# Altium PCB RF_SENSOR_AMP.PcbDoc
Units mm, origin at the board's own origin, x right, y up, seen from the top; angles counter-clockwise.
Board outline 43 x 19.3 mm, 2 copper layers (Top Layer, Bottom Layer); 24 components, 11 nets, 48 pads, 0 vias.
Unrouted connection lines stored in the file: 1.
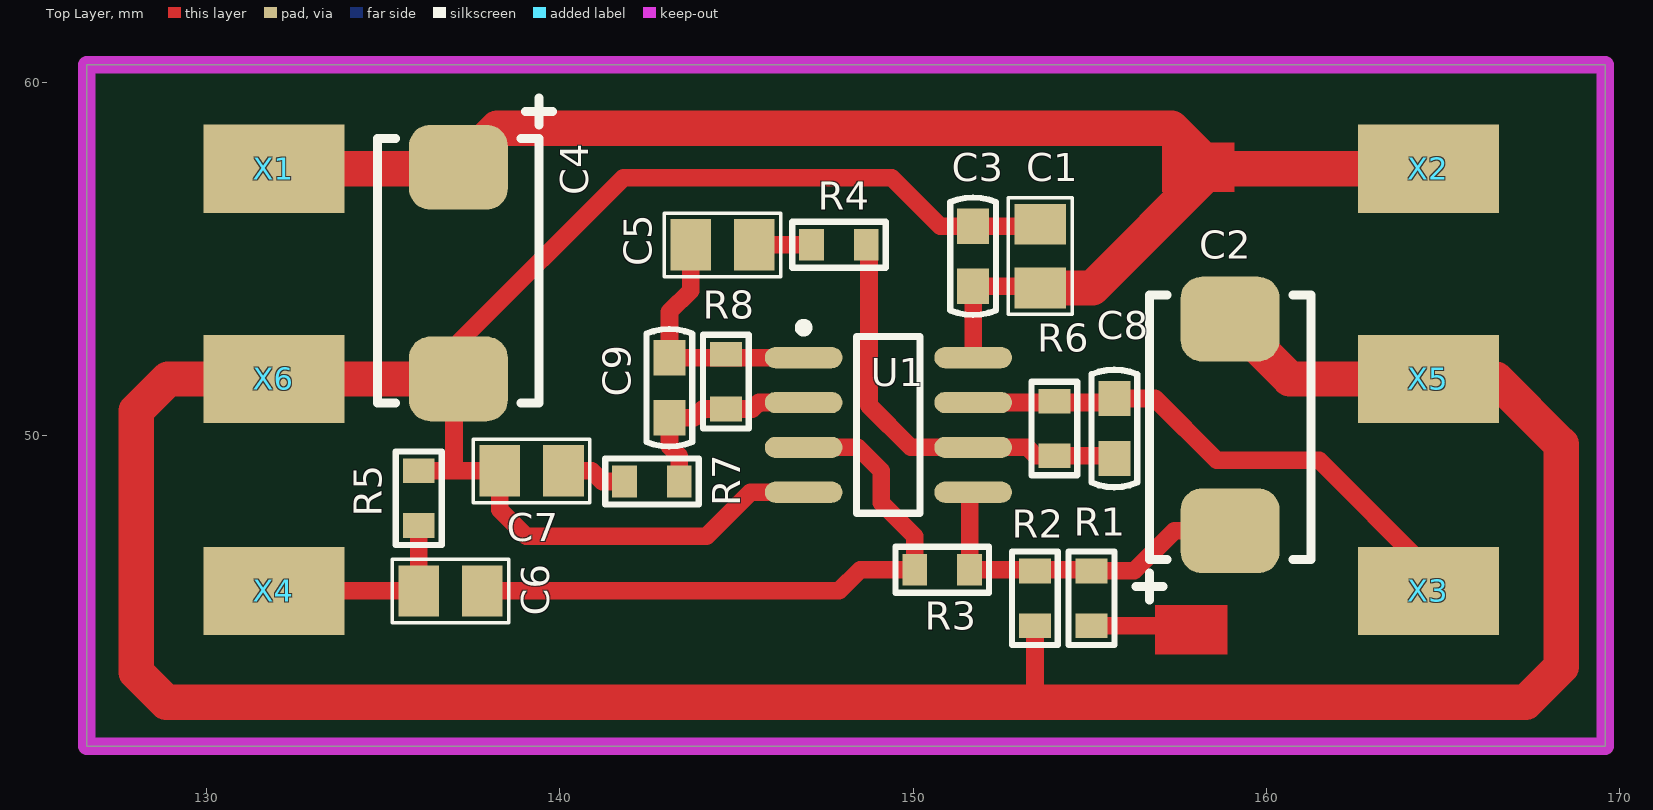
[diagram p0: Top Layer view]
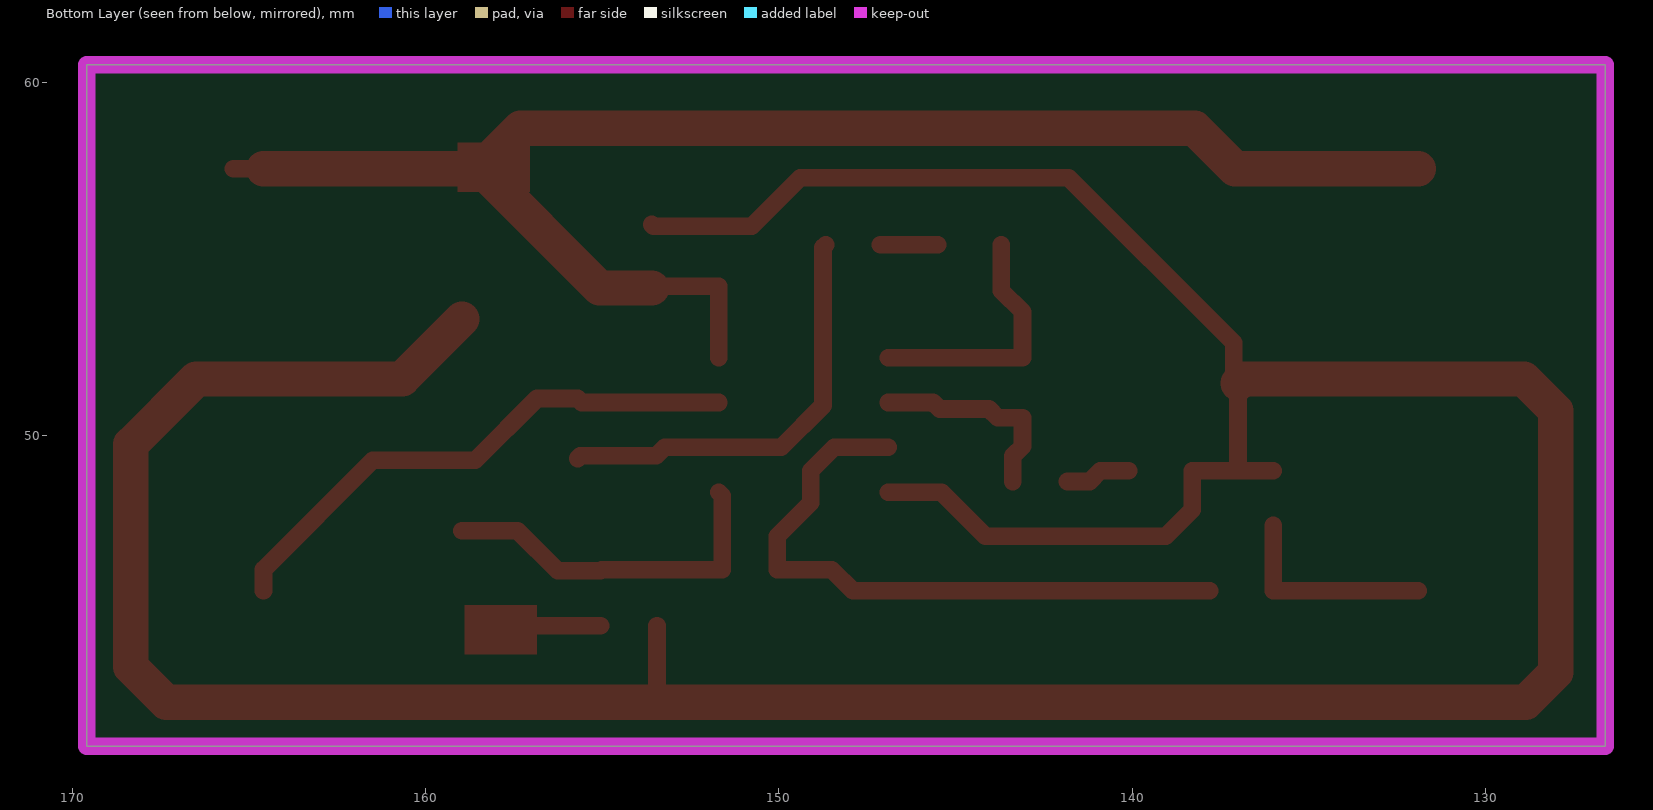
[diagram p1: Bottom Layer view, seen from below]
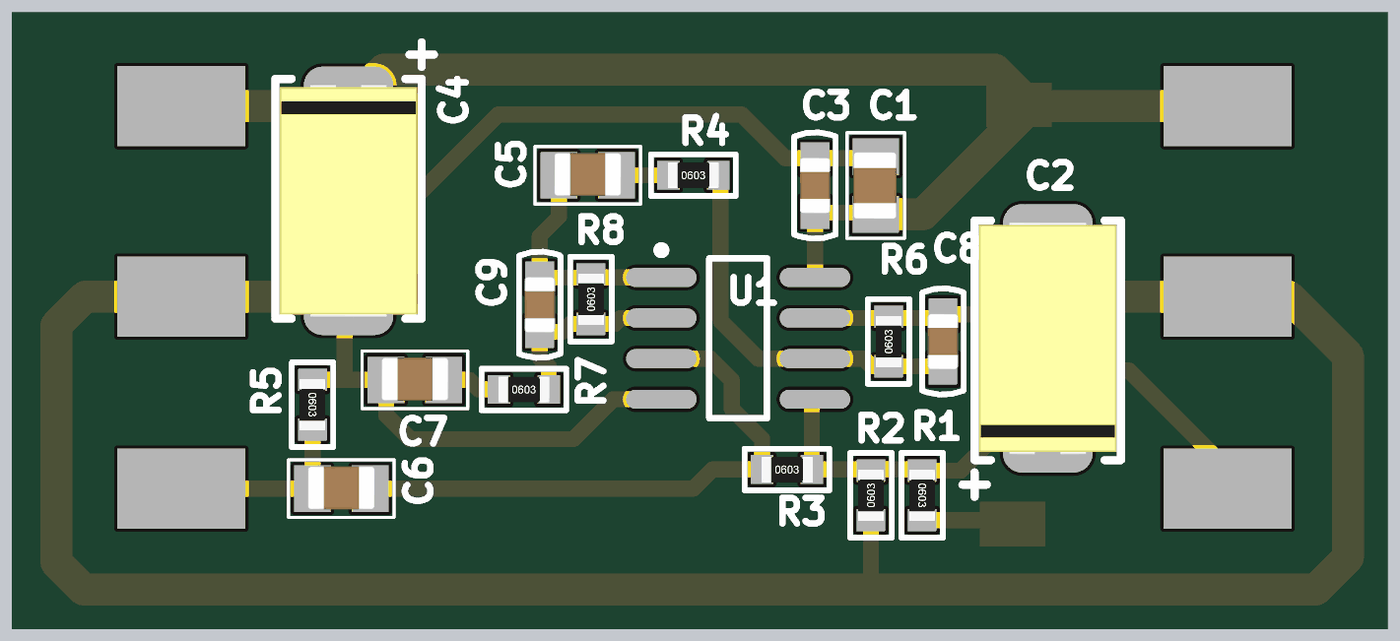
[diagram p2: 3D render of the assembled board from above, using the file's embedded part models]

## Layer stack, top to bottom
Top Solder: solder mask 0.0102, Solder Resist, Dk 3.5
Top Layer: signal copper 0.0356
Dielectric 1: dielectric 0.32, FR-4, Dk 4.8
Bottom Layer: signal copper 0.0356
Bottom Solder: solder mask 0.0102, Solder Resist, Dk 3.5

## Board outline
126.6,41.2 126.6,60.5 169.6,60.5 169.6,41.2

## Design rules (kind name [scope] priority, off if disabled: settings)
Clearance [All] p1: gap=0.5 ignorepadtopadclearanceinfootprint=FALSE
PolygonConnect [All] p1: connectstyle=Relief reliefconductorwidth=0.254 reliefentries=4 polygonreliefangle="90 Angle" airgapwidth=0.254
RoutingVias [All] p1: holewidth=0.711 width=1.27 viastyle="Through Hole" minholewidth=0.711 minwidth=1.27 maxholewidth=0.711 maxwidth=1.27
SolderMaskExpansion [All] p1: expansion=0.102
Width [All] p1: maxlimit=1 minlimit=0.3 preferedwidth=0.5
30 further rules are at their usual default settings.

## Components (designator, comment, footprint, x,y, rotation, side; value= is the part's Value field where it differs from the comment)
C1 "10uF" CC0805 153.6,55.078 r90 top
C2 "TAJ-D" TAJ-D-1M 159,50.3 r270 top value=470uFx6.3V
C3 "0.1uF" CC0603 151.7,55.078 r90 top
C4 "TAJ-D" TAJ-D-1M 137.1,54.6 r90 top value=470uFx6.3V
C5 "4.7uF" CC0805 144.6,55.4 r0 top
C6 "4.7uF" CC0805 136.9,45.6 r0 top
C7 "4.7uF" CC0805 139.2,49 r0 top
C8 "2.2nF" CC0603 155.7,50.2 r90 top
C9 "2.2nF" CC0603 143.1,51.35 r90 top
R1 "100k" RC0603 155.05,45.391 r270 top
R2 "100k" RC0603 153.45,45.391 r90 top
R3 "330k" RC0603 150.825,46.2 r0 top
R4 "10k" RC0603 147.9,55.4 r0 top
R5 "10k" RC0603 136,48.225 r270 top
R6 "1M" RC0603 154,50.2 r90 top
R7 "10k" RC0603 142.605,48.7 r0 top
R8 "1M" RC0603 144.7,51.525 r90 top
U1 "LM2904M" M08A_N 149.3,50.3 r0 top
X1 "PIN_2.5x4mm_SMD" PIN_2.5x4mm_SMD 131.9,57.558 r0 top
X2 "PIN_2.5x4mm_SMD" PIN_2.5x4mm_SMD 164.592,57.558 r0 top
X3 "PIN_2.5x4mm_SMD" PIN_2.5x4mm_SMD 164.592,45.6 r0 top
X4 "PIN_2.5x4mm_SMD" PIN_2.5x4mm_SMD 131.9,45.6 r0 top
X5 "PIN_2.5x4mm_SMD" PIN_2.5x4mm_SMD 164.592,51.603 r0 top
X6 "PIN_2.5x4mm_SMD" PIN_2.5x4mm_SMD 131.9,51.603 r0 top

## Footprints (in the part's own frame and the unit in brackets; to place one, negate y for a bottom-side part, rotate by r counter-clockwise, add the part's x,y. Pads: shape width x height; smd on the part's side, far side on the other; paste and mask are expansions set on the pad)
CC0603 [mm]
  rect 1x0.9 smd paste-25.4: 1(-0.85,0) 2(0.85,0)
  silkscreen extent -1.66,-0.65 1.66,0.65, body extent -0.87,-0.47 0.88,0.48, height 0.85
CC0805 [mm]
  rect 1.15x1.45 smd paste-25.4: 1(-0.9,0) 2(0.9,0)
  silkscreen extent -1.65,-0.9 1.65,0.9, body extent -1.05,-0.65 1.05,0.7, height 1.1
M08A_N [mm] "SOIC, 8-Leads, Body 4.9x3.9mm, Pitch 1.27mm, IPC Medium Density"
  oval 2.2x0.6 smd: 1(-2.4,1.905) 2(-2.4,0.635) 3(-2.4,-0.635) 4(-2.4,-1.905) 5(2.4,-1.905) 6(2.4,-0.635) 7(2.4,0.635) 8(2.4,1.905)
  silkscreen extent -2.52,-2.5 0.9,2.88, body extent -2,-2.5 2,2.5, height 1.75
PIN_2.5x4mm_SMD [mm]
  rect 4x2.5 smd: 1(0,0)
RC0603 [mm]
  rect 0.7x0.9 smd paste-25.4: 1(-0.775,0) 2(0.774,0)
  silkscreen extent -1.32,-0.65 1.33,0.65, body extent -0.8,-0.4 0.8,0.4, height 0.45
TAJ-D-1M [mm]
  rrect50% 2.4x2.8 smd: 1(2.997,-0.025) 2(-2.997,-0.025)
  silkscreen extent -3.68,-2.69 4.95,2.26, body extent -3.65,-2.18 3.65,2.12, height 2.81

## Part data
C1 C5 C6 C7: library part CC0805, "CC0805"
C3 C8 C9: library part CC0603, "CC0603"
R1 R2 R3 R4 R5 R6 R7 R8: library part RC0603, "RC0603"
U1: "Low Power Dual Operational Amplifier, 8-pin Narrow SOIC", Manufacturer="National Semiconductor", PackageTopMarking=NSZXTT*LM*2904M, PowerWise=N, Supplier Part Number 1=9486860, Code_IPC=SOIC127P600-8, Code_JEDEC=MS-012-AA, ComponentLink1Description="LM2904 Datasheet", ComponentLink1URL=http://www.national.com/ds/LM/LM2904.pdf, ComponentLink2Description="LM2904 Web Page", ComponentLink2URL=http://www.national.com/pf/LM/LM2904.html, ComponentLink3Description="M08A Package Page", ComponentLink3URL=http://www.national.com/packaging/folders/m08a.html, CompType=Amplifiers, DatasheetVersion=Oct-2005, LatestRevisionDate=13-Jan-2009, LatestRevisionNote="Sim Model Added.", PackageDescription="SOIC Narrow, 4.9 x 3.9 x 1.45mm, 8 Lead, 1.27mm Pitch", PackageReference=M08A, PackageVersion="revM, May-2009", PartNumber=LM2904M, PinCount=8, Published=4-Dec-2008, Publisher="Altium Limited", RoHS=N, Supplier 1=Farnell

## Nets (pads, with @x,y where several pads share a name; then routed paths per layer and width w, separated by ;. In a path a pad name is that pad's centre, name@x,y a point inside that pad or via, vN(x,y) a via of type N, cw(c..) or ccw(c..) an arc to the next point about the centre after c; other vN are vias at no path point)
+5V: C1.1 C3.1 C4.1 R1.2 U1.8 X1.1 X2.1 | length 47.1
  Top Layer w0.5: U1.8 C3.1 153.55,54.228 C1.1 ; R1.2 157.483,44.617 ; X2.1 X2.1@165.442,57.558
  Top Layer w1: X1.1 137.086,57.558 C4.1 138.228,58.7 157.316,58.7 158.458,57.558 ; C1.1 155.078,54.178 158.458,57.558 ; X2.1 158.458,57.558
GND: C1.2 C2.2 C3.2 C4.2 C7.1 R2.1 R5.1 U1.4 X5.1 X6.1 | length 112.6
  Top Layer w0.5: R5.1 137,49 ; C4.2@137,51.478 137,49 ; C4.2 137.125,52.625 141.8,57.3 149.4,57.3 150.772,55.928 C3.2 153.55,55.928 C1.2 ; U1.4 145.395,48.395 144.15,47.15 139.05,47.15 138.3,47.9 C7.1 137,49 ; R2.1 153.45,42.6 153.6,42.45
  Top Layer w1: C4.2@137,51.478 136.875,51.603 X6.1 128.903,51.603 128,50.7 128,43.3 128.85,42.45 153.6,42.45 167.35,42.45 168.35,43.45 168.35,49.75 166.497,51.603 X5.1 160.669,51.603 C2.2
NetC2_1: C2.1 R1.1 R2.2 R3.2 U1.5 | length 10.1
  Top Layer w0.5: U1.5 151.599,48.294 R3.2 155.016,46.2 R1.1 156.266,46.166 157.403,47.303 C2.1
NetC5_1: C5.1 C9.2 R8.2 U1.1 | length 7.3
  Top Layer w0.5: C5.1 143.7,54.1 143.1,53.5 C9.2 144.601,52.2 144.606,52.205 U1.1
NetC5_2: C5.2 R4.1 | length 1.6
  Top Layer w0.5: C5.2 R4.1
NetC6_1: C6.1 R5.2 X4.1 | length 6
  Top Layer w0.5: X4.1 C6.1 R5.2
NetC6_2: C6.2 R3.1 U1.3 | length 18.2
  Top Layer w0.5: C6.2 147.9,45.6 148.5,46.2 R3.1 150.05,47.15 149.1,48.1 149.1,49 148.435,49.665 U1.3
NetC7_2: C7.2 R7.1 | length 1.9
  Top Layer w0.5: C7.2 140.9,49 141.2,48.7 R7.1
NetC8_1: C8.1 R4.2 R6.1 U1.6 | length 12.2
  Top Layer w0.5: R4.2 148.75,55.324 148.75,50.85 149.935,49.665 U1.6 153.235,49.665 153.475,49.425 R6.1 155.625,49.425 C8.1
NetC8_2: C8.2 R6.2 U1.7 X3.1 | length 15.6
  Top Layer w0.5: U1.7 155.585,50.935 C8.2 156.85,51.05 158.6,49.3 161.5,49.3 164.592,46.208 X3.1
NetC9_1: C9.1 R7.2 R8.1 U1.2 | length 5.9
  Top Layer w0.5: R7.2 143.379,49.421 143.1,49.7 C9.1 143.8,50.5 144.05,50.75 R8.1 145.45,50.75 145.635,50.935 U1.2

## Polygon pours and split planes (outlines as drawn)
no net on Top Layer "NONET_L01_P000" (hatched Horizontal grid 0.2 track 0.2, remove dead copper, pour order 0): 156.9,45

## Keep-outs
Keep-Out Layer:
  the board outline again, w0.5

## Other copper
Top Layer:
  rectangle net +5V: 157.05,56.9 159.1,58.3
  rectangle net +5V: 156.85,43.8 158.9,45.2